# EAGLE board RAM Board (EAGLE 6.4)

Size 0 x 100.03 mm. Coordinates in mm from the lower left corner, seen from the top.
Copper layers (1*16): Top 0.035mm / dielectric 1.5mm / Bottom 0.035mm
Design rules "default": minimum track width 10mil, minimum drill 24mil, track to track 8mil, track to pad 8mil, pad to pad 8mil, via to via 8mil, smd to smd 8mil, copper to edge 40mil, drill to drill 8mil, minimum pad ring 10mil, minimum via ring 8mil, stop-mask expansion 4mil, vias tented up to drill 0mil, thermal gap 10mil

## Footprints (pad centres in the part's own frame; a part is rotated, then mirrored left to right if it is on the bottom)
CAP-PTH-SMALL = drill 0.7 pad 1.651: 1 0,0; 2 2.54,0
DIL14 = drill 0.813 long: 1 -7.62,-3.81; 2 -5.08,-3.81; 3 -2.54,-3.81; 4 0,-3.81; 5 2.54,-3.81; 6 5.08,-3.81; 7 7.62,-3.81; 8 7.62,3.81; 9 5.08,3.81; 10 2.54,3.81; 11 0,3.81; 12 -2.54,3.81; 13 -5.08,3.81; 14 -7.62,3.81
DIL16 = drill 0.813 long: 1 -8.89,-3.81; 2 -6.35,-3.81; 3 -3.81,-3.81; 4 -1.27,-3.81; 5 1.27,-3.81; 6 3.81,-3.81; 7 6.35,-3.81; 8 8.89,-3.81; 9 8.89,3.81; 10 6.35,3.81; 11 3.81,3.81; 12 1.27,3.81; 13 -1.27,3.81; 14 -3.81,3.81; 15 -6.35,3.81; 16 -8.89,3.81
DIL32 = drill 0.813 long: 1 -17.78,-7.62; 2 -15.24,-7.62; 3 -12.7,-7.62; 4 -10.16,-7.62; 5 -7.62,-7.62; 6 -5.08,-7.62; 7 -2.54,-7.62; 8 0,-7.62; 9 2.54,-7.62; 10 5.08,-7.62; 11 7.62,-7.62; 12 10.16,-7.62; 13 12.7,-7.62; 14 15.24,-7.62; 15 17.78,-7.62; 16 20.32,-7.62; 17 20.32,7.62; 18 17.78,7.62; 19 15.24,7.62; 20 12.7,7.62; 21 10.16,7.62; 22 7.62,7.62; 23 5.08,7.62; 24 2.54,7.62; 25 0,7.62; 26 -2.54,7.62; 27 -5.08,7.62; 28 -7.62,7.62; 29 -10.16,7.62; 30 -12.7,7.62; 31 -15.24,7.62; 32 -17.78,7.62
BLANKBOARD = drill 0.914 octagon: 3V3 71.12,39.37; 5V 76.2,36.83; 5VSB 71.12,36.83; 12V 76.2,39.37; $1 71.12,-3.81; $2 71.12,-1.27; $3 71.12,1.27; $4 71.12,3.81; $5 71.12,6.35; -12V 76.2,-39.37; /AS 71.12,-19.05; /BOOT 71.12,-8.89; /CLK 71.12,-24.13; /LDS 71.12,-16.51; /RESET 71.12,-6.35; /UDS 71.12,-13.97; /VMA 71.12,16.51; A0 71.12,-26.67; A1 71.12,-29.21; A2 71.12,-31.75; A3 71.12,-34.29; A4 71.12,-36.83; A5 76.2,-36.83; A6 76.2,-34.29; A7 76.2,-31.75; A8 76.2,-29.21; A9 76.2,-26.67; A10 76.2,-24.13; A11 76.2,-21.59; A12 76.2,-19.05; A13 76.2,-16.51; A14 76.2,-13.97; A15 76.2,-11.43; A16 76.2,-8.89; A17 76.2,-6.35; A18 76.2,-3.81; A19 76.2,-1.27; A20 76.2,1.27; A21 76.2,3.81; A22 76.2,6.35; A23 76.2,8.89; C12 71.12,11.43; C13 71.12,8.89; CLK 71.12,-21.59; D0 71.12,21.59; D1 71.12,24.13; D2 71.12,26.67; D3 71.12,29.21; D4 71.12,31.75; D5 71.12,34.29; D6 76.2,34.29; D7 76.2,31.75; D8 76.2,29.21; D9 76.2,26.67; D10 76.2,24.13; D11 76.2,21.59; D12 76.2,19.05; D13 76.2,16.51; D14 76.2,13.97; D15 76.2,11.43; E 71.12,19.05; GND 71.12,-39.37; R/W 71.12,-11.43; VPA 71.12,13.97 | drill 2.8: P$1 78.74,44.45; P$2 78.74,-44.45

## Placement (x,y rotation side)
C1  100nF  [CAP-PTH-SMALL]  -143.76,-3.33 90 top  (outside the outline)
C2  100nF  [CAP-PTH-SMALL]  -139.95,-3.33 90 top  (outside the outline)
C3  100nF  [CAP-PTH-SMALL]  -136.14,-3.33 90 top  (outside the outline)
C4  100nF  [CAP-PTH-SMALL]  -132.33,-3.33 90 top  (outside the outline)
C5  100nF  [CAP-PTH-SMALL]  -128.52,-3.33 90 top  (outside the outline)
C6  100nF  [CAP-PTH-SMALL]  -124.71,-3.33 90 top  (outside the outline)
C7  100nF  [CAP-PTH-SMALL]  -120.9,-3.33 90 top  (outside the outline)
C8  100nF  [CAP-PTH-SMALL]  -117.09,-3.33 90 top  (outside the outline)
C9  100nF  [CAP-PTH-SMALL]  -143.76,-8.41 90 top  (outside the outline)
C10  100nF  [CAP-PTH-SMALL]  -139.95,-8.41 90 top  (outside the outline)
C11  100nF  [CAP-PTH-SMALL]  -136.14,-8.41 90 top  (outside the outline)
IC1  74LS32N  [DIL14]  -24.38,18.26 270 top  (outside the outline)
IC2  74LS04N  [DIL14]  -37.08,18.26 270 top  (outside the outline)
IC3  74LS138N  [DIL16]  -21.84,80.49 90 top  (outside the outline)
IC6  74LS32N  [DIL14]  -35.81,79.22 270 top  (outside the outline)
U1  AS6C4008  [DIL32]  -70.1,27.15 90 top  (outside the outline)
U2  AS6C4008  [DIL32]  -70.1,70.33 90 top  (outside the outline)
U3  AS6C4008  [DIL32]  -90.42,27.15 90 top  (outside the outline)
U4  AS6C4008  [DIL32]  -90.42,70.33 90 top  (outside the outline)
U5  AS6C4008  [DIL32]  -110.74,27.15 90 top  (outside the outline)
U6  AS6C4008  [DIL32]  -110.74,70.33 90 top  (outside the outline)
U7  AS6C4008  [DIL32]  -131.06,27.15 90 top  (outside the outline)
U8  AS6C4008  [DIL32]  -131.06,70.33 90 top  (outside the outline)
U$1  BLANKBOARD  [BLANKBOARD]  -81.53,50.01 0 top

## Library data of the parts
C1-C11 = SparkFun-Capacitors
IC1 IC6 = 74xx-us
IC2 IC3 = 74xx-eu
U1-U8 U$1 = Benchoff

## Nets
/AS: IC3.1 U$1./AS
/BOOT: IC6.1 IC6.4 IC6.9 IC6.12
/LDS: IC1.4 IC1.12 U$1./LDS
/UDS: IC1.1 IC1.9 U$1./UDS
ADDRESS0: U1.12 U2.12 U3.12 U4.12 U5.12 U6.12 U7.12 U8.12 U$1.A0
ADDRESS1: U1.11 U2.11 U3.11 U4.11 U5.11 U6.11 U7.11 U8.11 U$1.A1
ADDRESS2: U1.10 U2.10 U3.10 U4.10 U5.10 U6.10 U7.10 U8.10 U$1.A2
ADDRESS3: U1.9 U2.9 U3.9 U4.9 U5.9 U6.9 U7.9 U8.9 U$1.A3
ADDRESS4: U1.8 U2.8 U3.8 U4.8 U5.8 U6.8 U7.8 U8.8 U$1.A4
ADDRESS5: U1.7 U2.7 U3.7 U4.7 U5.7 U6.7 U7.7 U8.7 U$1.A5
ADDRESS6: U1.6 U2.6 U3.6 U4.6 U5.6 U6.6 U7.6 U8.6 U$1.A6
ADDRESS7: U1.5 U2.5 U3.5 U4.5 U5.5 U6.5 U7.5 U8.5 U$1.A7
ADDRESS8: U1.27 U2.27 U3.27 U4.27 U5.27 U6.27 U7.27 U8.27 U$1.A8
ADDRESS9: U1.26 U2.26 U3.26 U4.26 U5.26 U6.26 U7.26 U8.26 U$1.A9
ADDRESS10: U1.23 U2.23 U3.23 U4.23 U5.23 U6.23 U7.23 U8.23 U$1.A10
ADDRESS11: U1.25 U2.25 U3.25 U4.25 U5.25 U6.25 U7.25 U8.25 U$1.A11
ADDRESS12: U1.4 U2.4 U3.4 U4.4 U5.4 U6.4 U7.4 U8.4 U$1.A12
ADDRESS13: U1.28 U2.28 U3.28 U4.28 U5.28 U6.28 U7.28 U8.28 U$1.A13
ADDRESS14: U1.3 U2.3 U3.3 U4.3 U5.3 U6.3 U7.3 U8.3 U$1.A14
ADDRESS15: U1.31 U2.31 U3.31 U4.31 U5.31 U6.31 U7.31 U8.31 U$1.A15
ADDRESS16: U1.2 U2.2 U3.2 U4.2 U5.2 U6.2 U7.2 U8.2 U$1.A16
ADDRESS17: U1.30 U2.30 U3.30 U4.30 U5.30 U6.30 U7.30 U8.30 U$1.A17
ADDRESS18: U1.1 U2.1 U3.1 U4.1 U5.1 U6.1 U7.1 U8.1 U$1.A18
ADDRESS20: IC3.2 U$1.A20
ADDRESS21: IC3.3 U$1.A21
BANKACS: IC6.6 U1.22 U2.22
BANKBCS: IC6.11 U3.22 U4.22
BANKCCS: IC6.8 U5.22 U6.22
BANKDCS: IC6.3 U7.22 U8.22
DATA0: U2.13 U4.13 U6.13 U8.13 U$1.D0
DATA1: U2.14 U4.14 U6.14 U8.14 U$1.D1
DATA2: U2.15 U4.15 U6.15 U8.15 U$1.D2
DATA3: U2.17 U4.17 U6.17 U8.17 U$1.D3
DATA4: U2.18 U4.18 U6.18 U8.18 U$1.D4
DATA5: U2.19 U4.19 U6.19 U8.19 U$1.D5
DATA6: U2.20 U4.20 U6.20 U8.20 U$1.D6
DATA7: U2.21 U4.21 U6.21 U8.21 U$1.D7
DATA8: U1.13 U3.13 U5.13 U7.13 U$1.D8
DATA9: U1.14 U3.14 U5.14 U7.14 U$1.D9
DATA10: U1.15 U3.15 U5.15 U7.15 U$1.D10
DATA11: U1.17 U3.17 U5.17 U7.17 U$1.D11
DATA12: U1.18 U3.18 U5.18 U7.18 U$1.D12
DATA13: U1.19 U3.19 U5.19 U7.19 U$1.D13
DATA14: U1.20 U3.20 U5.20 U7.20 U$1.D14
DATA15: U1.21 U3.21 U5.21 U7.21 U$1.D15
GND: C1.2 C2.2 C3.2 C4.2 C5.2 C6.2 C7.2 C8.2 C9.2 C10.2 C11.2 IC1.7 IC2.7 IC3.4 IC3.5 IC3.8 IC6.7 U1.16 U2.16 U3.16 U4.16 U5.16 U6.16 U7.16 U8.16 U$1.GND
N$3: IC1.2 IC1.5 IC2.2
N$18: IC3.9 IC6.2
N$20: IC3.11 IC6.10
N$22: IC3.13 IC6.13
N$24: IC3.15 IC6.5
R/W: IC1.10 IC1.13 IC2.1 U$1.R/W
READHI: IC1.3 U1.24 U3.24 U5.24 U7.24
READLO: IC1.6 U2.24 U4.24 U6.24 U8.24
VCC: C1.1 C2.1 C3.1 C4.1 C5.1 C6.1 C7.1 C8.1 C9.1 C10.1 C11.1 IC1.14 IC2.14 IC3.6 IC3.16 IC6.14 U1.32 U2.32 U3.32 U4.32 U5.32 U6.32 U7.32 U8.32 U$1.5V
WRITEHI: IC1.8 U1.29 U3.29 U5.29 U7.29
WRITELO: IC1.11 U2.29 U4.29 U6.29 U8.29

## Tracks (layer width: path | path; a pad name or v marks a point on that pad's centre or on a via)
/AS  (1 unrouted)
/BOOT  (3 unrouted)
/LDS  (2 unrouted)
/UDS  (2 unrouted)
ADDRESS0  (8 unrouted)
ADDRESS1  (8 unrouted)
ADDRESS2  (8 unrouted)
ADDRESS3  (8 unrouted)
ADDRESS4  (8 unrouted)
ADDRESS5  (8 unrouted)
ADDRESS6  (8 unrouted)
ADDRESS7  (8 unrouted)
ADDRESS8  (8 unrouted)
ADDRESS9  (8 unrouted)
ADDRESS10  (8 unrouted)
ADDRESS11  (8 unrouted)
ADDRESS12  (8 unrouted)
ADDRESS13  (8 unrouted)
ADDRESS14  (8 unrouted)
ADDRESS15  (8 unrouted)
ADDRESS16  (8 unrouted)
ADDRESS17  (8 unrouted)
ADDRESS18  (8 unrouted)
ADDRESS20  (1 unrouted)
ADDRESS21  (1 unrouted)
BANKACS  (2 unrouted)
BANKBCS  (2 unrouted)
BANKCCS  (2 unrouted)
BANKDCS  (2 unrouted)
DATA0  (4 unrouted)
DATA1  (4 unrouted)
DATA2  (4 unrouted)
DATA3  (4 unrouted)
DATA4  (4 unrouted)
DATA5  (4 unrouted)
DATA6  (4 unrouted)
DATA7  (4 unrouted)
DATA8  (4 unrouted)
DATA9  (4 unrouted)
DATA10  (4 unrouted)
DATA11  (4 unrouted)
DATA12  (4 unrouted)
DATA13  (4 unrouted)
DATA14  (4 unrouted)
DATA15  (4 unrouted)
GND  (25 unrouted)
N$3  (2 unrouted)
N$18  (1 unrouted)
N$20  (1 unrouted)
N$22  (1 unrouted)
N$24  (1 unrouted)
R/W  (3 unrouted)
READHI  (4 unrouted)
READLO  (4 unrouted)
VCC  (24 unrouted)
WRITEHI  (4 unrouted)
WRITELO  (4 unrouted)